# EAGLE board Syno_Ver1.2 (EAGLE 9.5.2)
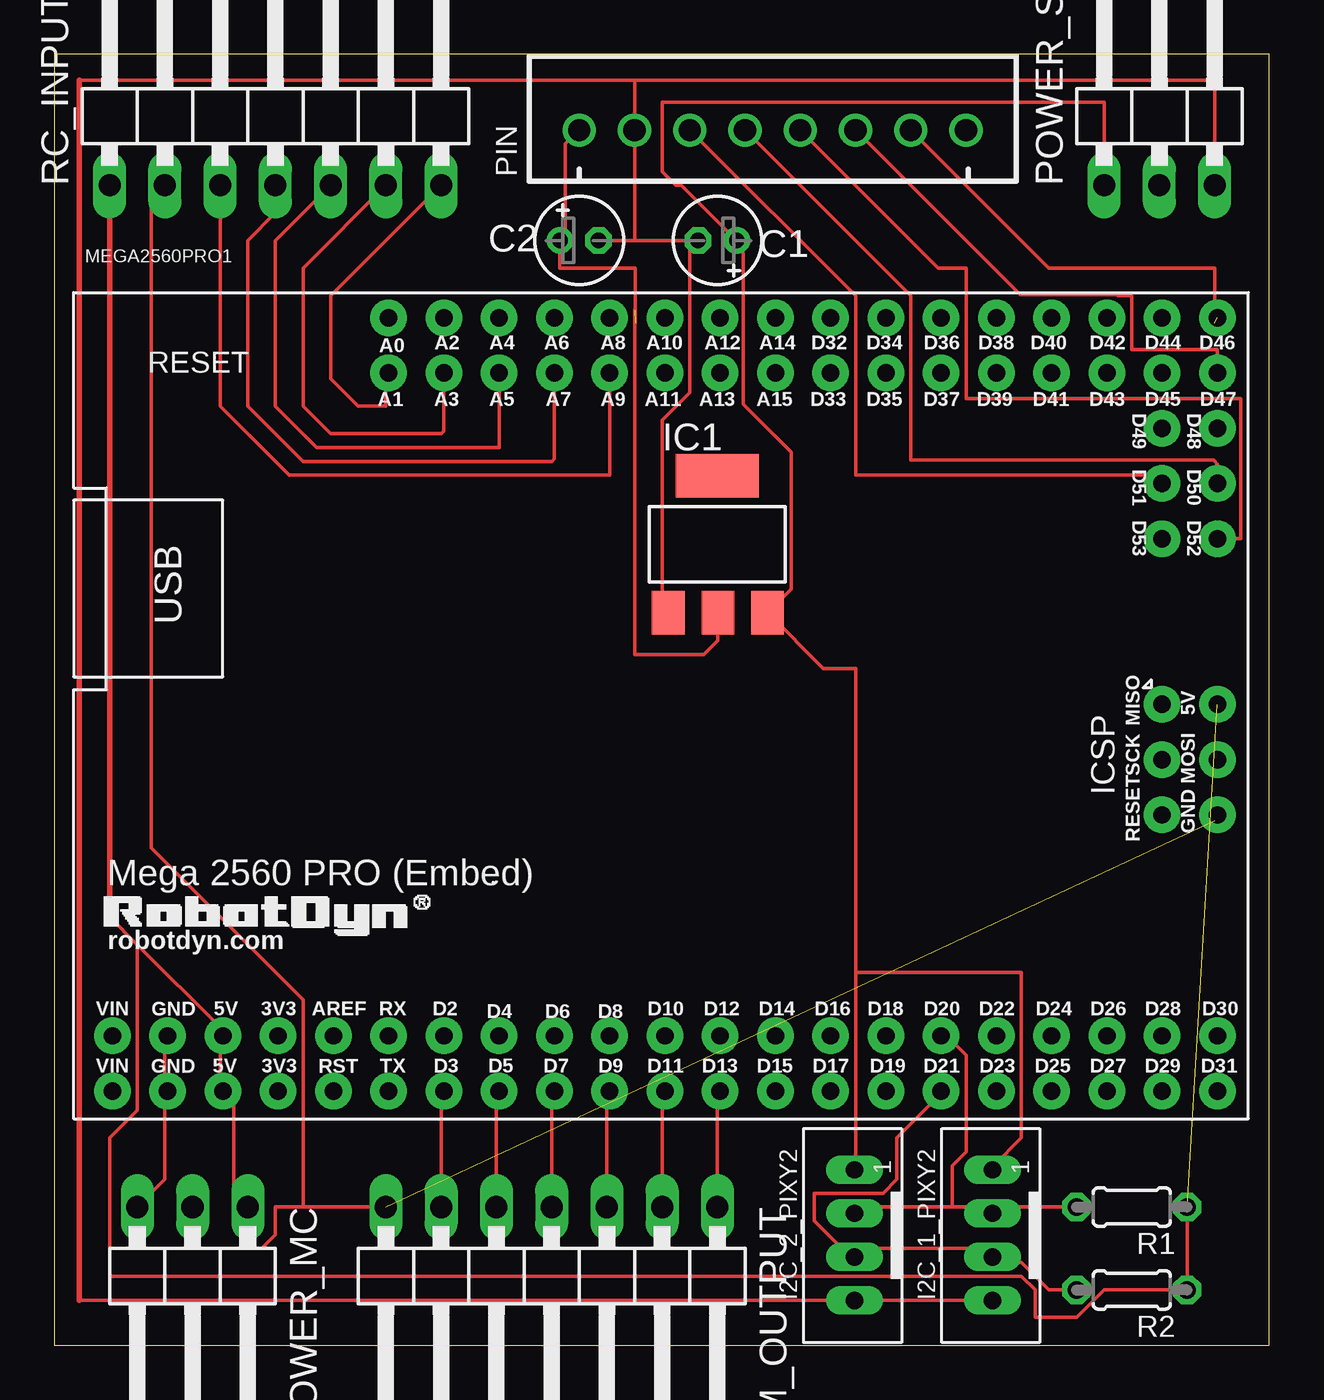
[diagram p0: board, top side]

Size 55.86 x 59.36 mm. Coordinates in mm from the lower left corner, seen from the top.
Outline: 0,0 55.86,0 55.86,59.36 0,59.36 0,0
Copper layers (1*16): Top 0.035mm / dielectric 1.5mm / Bottom 0.035mm
Design rules "default": minimum track width 6mil, minimum drill 0.35mm, track to track 6mil, track to pad 6mil, pad to pad 6mil, via to via 6mil, smd to smd 6mil, copper to edge 40mil, drill to drill 6mil, minimum pad ring 10mil, minimum via ring 8mil, stop-mask expansion 4mil, vias tented up to drill 0mil, thermal gap 10mil

## Footprints (pad centres in the part's own frame; a part is rotated, then mirrored left to right if it is on the bottom)
E1,8-4 = drill 0.711 pad 1.168: + -0.889,0 | drill 0.711 pad 1.168 octagon: - 0.889,0
JST_B4B-PH_HEADER = drill 0.8 long: P1 2.98,0.048; P2 0.98,0.048; P3 -1.02,0.048; P4 -3.02,0.048
SOT223 = smd 1.499 x 2.007: 1 -2.261,-3.15; 2 0.025,-3.15; 3 2.311,-3.15 | smd 3.81 x 2.007: 4 0,3.15
MEGA2560PRO-EMBED = drill 0.8 pad 1.676: 3V3@1 -25.4,-19.05; 3V3@2 -25.4,-16.51; 5V@1 -27.94,-19.05; 5V@2 -27.94,-16.51; 5V@3 17.78,-1.27; A0 -20.32,16.51; A1 -20.32,13.97; A2 -17.78,16.51; A3 -17.78,13.97; A4 -15.24,16.51; A5 -15.24,13.97; A6 -12.7,16.51; A7 -12.7,13.97; A8 -10.16,16.51; A9 -10.16,13.97; A10 -7.62,16.51; A11 -7.62,13.97; A12 -5.08,16.51; A13 -5.08,13.97; A14 -2.54,16.51; A15 -2.54,13.97; AREF -22.86,-16.51; D2 -17.78,-16.51; D3 -17.78,-19.05; D4 -15.24,-16.51; D5 -15.24,-19.05; D6 -12.7,-16.51; D7 -12.7,-19.05; D8 -10.16,-16.51; D9 -10.16,-19.05; D10 -7.62,-16.51; D11 -7.62,-19.05; D12 -5.08,-16.51; D13 -5.08,-19.05; D14 -2.54,-16.51; D15 -2.54,-19.05; D16 0,-16.51; D17 0,-19.05; D18 2.54,-16.51; D19 2.54,-19.05; D20 5.08,-16.51; D21 5.08,-19.05; D22 7.62,-16.51; D23 7.62,-19.05; D24 10.16,-16.51; D25 10.16,-19.05; D26 12.7,-16.51; D27 12.7,-19.05; D28 15.24,-16.51; D29 15.24,-19.05; D30 17.78,-16.51; D31 17.78,-19.05; D32 0,16.51; D33 0,13.97; D34 2.54,16.51; D35 2.54,13.97; D36 5.08,16.51; D37 5.08,13.97; D38 7.62,16.51; D39 7.62,13.97; D40 10.16,16.51; D41 10.16,13.97; D42 12.7,16.51; D43 12.7,13.97; D44 15.24,16.51; D45 15.24,13.97; D46 17.78,16.51; D47 17.78,13.97; D48 17.78,11.43; D49 15.24,11.43; D50 17.78,8.89; D51 15.24,8.89; D52 17.78,6.35; D53 15.24,6.35; GND@1 -30.48,-19.05; GND@2 -30.48,-16.51; GND@3 17.78,-6.35; MISO 15.24,-1.27; MOSI 17.78,-3.81; RESET 15.24,-6.35; RST -22.86,-19.05; RX -20.32,-16.51; SCK 15.24,-3.81; TX -20.32,-19.05; VIN@1 -33.02,-19.05; VIN@2 -33.02,-16.51
JST-XH-08-PACKAGE-ROUND-PAD = drill 1.016: 1 -8.89,0; 2 -6.35,0; 3 -3.81,0; 4 -1.27,0; 5 1.27,0; 6 3.81,0; 7 6.35,0; 8 8.89,0
1X03/90 = drill 1.016 long: 1 -2.54,-3.81; 2 0,-3.81; 3 2.54,-3.81
1X07/90 = drill 1.016 long: 1 -7.62,-3.81; 2 -5.08,-3.81; 3 -2.54,-3.81; 4 0,-3.81; 5 2.54,-3.81; 6 5.08,-3.81; 7 7.62,-3.81
0204/5 = drill 0.813 octagon: 1 -2.54,0; 2 2.54,0

## Placement (x,y rotation side)
C1  10  [E1,8-4]  30.48,50.8 180 top
C2  10  [E1,8-4]  24.13,50.8 0 top
I2C_1_PIXY2  [JST_B4B-PH_HEADER]  43.18,5.08 90 top
I2C_2_PIXY2  [JST_B4B-PH_HEADER]  36.83,5.08 90 top
IC1  REG1117  [SOT223]  30.48,36.83 0 top
MEGA2560PRO1  MEGA2560PRO-EMBED  [MEGA2560PRO-EMBED]  35.69,30.73 0 top
PIN  nRF24L01  [JST-XH-08-PACKAGE-ROUND-PAD]  33.02,55.88 0 top
POWER_MC  [1X03/90]  6.35,2.54 180 top
POWER_SENSOR  [1X03/90]  50.8,57.15 0 top
PWM_OUTPUT  [1X07/90]  22.86,2.54 180 top
R1  1000k  [0204/5]  49.53,6.35 180 top
R2  1000k  [0204/5]  49.53,2.54 180 top
RC_INPUT  [1X07/90]  10.16,57.15 0 top

## Library data of the parts
C1 C2 = rcl; SPICEPREFIX: C
I2C_1_PIXY2 I2C_2_PIXY2 = srg
IC1 = burr-brown; MPN: REG1117; OC_FARNELL: 1097566; OC_NEWARK: 14P6981
MEGA2560PRO1 = robotdyn
PIN = Rembrandt Electronics - JST XH Connectors v1-0
POWER_MC POWER_SENSOR PWM_OUTPUT RC_INPUT = pinhead
R1 R2 = rcl; SPICEPREFIX: R

## Nets
5V: MEGA2560PRO1.5V@1 MEGA2560PRO1.5V@2 MEGA2560PRO1.5V@3 POWER_MC.1 R1.1 R2.1 RC_INPUT.1
5V_S: C1.+ I2C_1_PIXY2.P1 I2C_2_PIXY2.P1 IC1.3 POWER_SENSOR.1
GND: MEGA2560PRO1.GND@1 MEGA2560PRO1.GND@2 MEGA2560PRO1.GND@3 POWER_MC.3 PWM_OUTPUT.7 RC_INPUT.2
GND_S: C1.- C2.- I2C_1_PIXY2.P4 I2C_2_PIXY2.P4 IC1.1 PIN.2 POWER_SENSOR.3
N$1: MEGA2560PRO1.D51 PIN.3
N$2: C2.+ IC1.2 PIN.1
N$3: MEGA2560PRO1.D50 PIN.4
N$4: MEGA2560PRO1.D52 PIN.5
N$5: MEGA2560PRO1.D47 PIN.6
N$6: MEGA2560PRO1.D46 PIN.7
N$7: MEGA2560PRO1.D13 PWM_OUTPUT.1
N$8: MEGA2560PRO1.D11 PWM_OUTPUT.2
N$9: MEGA2560PRO1.D9 PWM_OUTPUT.3
N$10: MEGA2560PRO1.D7 PWM_OUTPUT.4
N$11: MEGA2560PRO1.D5 PWM_OUTPUT.5
N$12: MEGA2560PRO1.D3 PWM_OUTPUT.6
N$13: MEGA2560PRO1.A9 RC_INPUT.3
N$14: MEGA2560PRO1.A7 RC_INPUT.4
N$15: MEGA2560PRO1.A5 RC_INPUT.5
N$16: MEGA2560PRO1.A3 RC_INPUT.6
N$17: MEGA2560PRO1.A1 RC_INPUT.7
SCL: I2C_1_PIXY2.P3 I2C_2_PIXY2.P3 MEGA2560PRO1.D21 R2.2
SDA: I2C_1_PIXY2.P2 I2C_2_PIXY2.P2 MEGA2560PRO1.D20 R1.2

## Tracks (layer width: path | path; a pad name or v marks a point on that pad's centre or on a via)
5V  (1 unrouted)
  Top 0.152: POWER_MC.1 8.26,6.99 8.26,11.43 MEGA2560PRO1.5V@1 7.62,12.07 7.62,13.97 MEGA2560PRO1.5V@2 7.62,14.61 3.81,18.41 | R1.1 R2.1 48.26,2.54 46.99,1.27 45.09,1.27 45.09,2.54 44.45,3.17 2.54,3.17 2.54,9.53 3.81,10.8 3.81,18.41 | 3.81,18.41 2.54,19.68
  Top 0.254: 2.54,19.68 RC_INPUT.1
5V_S
  Top 0.152: 36.83,17.14 36.83,31.11 35.36,31.11 IC1.3 33.88,34.77 33.88,41.08 31.67,43.29 31.67,50.23 31.37,50.53 C1.+ | 36.83,17.14 36.83,8.25 I2C_2_PIXY2.P1 | 36.83,17.14 44.45,17.14 44.45,9.53 43.18,8.25 I2C_1_PIXY2.P1 | 31.75,50.8 C1.+ | POWER_SENSOR.1 48.26,57.15 27.94,57.15 27.94,53.98 28.57,53.34 28.83,53.34 C1.+
GND  (1 unrouted)
  Top 0.152: 11.43,6.35 10.16,6.35 10.16,5.08 9.53,4.45 3.81,4.45 POWER_MC.3 5.08,7.62 5.08,11.43 MEGA2560PRO1.GND@1 5.08,12.07 5.08,13.97 MEGA2560PRO1.GND@2 | 11.43,6.35 PWM_OUTPUT.7 | RC_INPUT.2 4.45,52.7 4.45,22.86 11.43,15.88 11.43,6.35 | 53.34,24.13 MEGA2560PRO1.GND@3
GND_S
  Top 0.152: 29.21,50.8 29.21,43.81 27.94,42.55 27.94,33.96 IC1.1 | 29.21,50.8 26.67,50.8 | 26.67,50.8 C2.- | 29.21,50.8 C1.- | I2C_1_PIXY2.P4 I2C_2_PIXY2.P4 1.14,2.06 | POWER_SENSOR.3 53.34,58.17 26.67,58.17 | 1.14,58.17 26.67,58.17 | 26.67,58.17 PIN.2 26.67,50.8
  Top 0.254: 1.14,58.17 1.14,2.06
N$1
  Top 0.152: PIN.3 36.83,48.26 36.83,40.01 50.8,40.01 MEGA2560PRO1.D51
N$2  (1 unrouted)
  Top 0.152: PIN.1 23.5,55.24 23.5,50.8 C2.+ 23.24,49.53 26.7,49.53 26.7,46.99 | 26.67,47.62 26.67,31.75 29.84,31.75 30.5,32.41 IC1.2
N$3
  Top 0.152: 53.34,40.01 MEGA2560PRO1.D50 53.47,40.51 53.29,40.69 39.37,40.69 39.37,48.26 PIN.4
N$4
  Top 0.152: PIN.5 40.64,49.53 41.91,49.53 41.91,43.54 54.53,43.54 54.53,37.08 MEGA2560PRO1.D52
N$5
  Top 0.152: PIN.6 44.4,48.31 48.83,48.31 48.88,48.26 49.53,48.26 49.53,45.77 53.47,45.77 MEGA2560PRO1.D47
N$6  (1 unrouted)
  Top 0.152: PIN.7 45.72,49.53 53.34,49.53 53.34,46.99
N$7
  Top 0.152: PWM_OUTPUT.1 30.48,11.43 MEGA2560PRO1.D13
N$8
  Top 0.152: PWM_OUTPUT.2 27.94,11.43 MEGA2560PRO1.D11
N$9
  Top 0.152: PWM_OUTPUT.3 25.4,11.43 MEGA2560PRO1.D9
N$10
  Top 0.152: PWM_OUTPUT.4 22.86,11.43 MEGA2560PRO1.D7
N$11
  Top 0.152: PWM_OUTPUT.5 20.32,11.43 MEGA2560PRO1.D5
N$12
  Top 0.152: PWM_OUTPUT.6 17.78,11.43 MEGA2560PRO1.D3
N$13
  Top 0.152: RC_INPUT.3 7.62,43.18 10.79,40.01 25.53,40.01 MEGA2560PRO1.A9
N$14
  Top 0.152: MEGA2560PRO1.A7 22.99,40.77 22.86,40.64 11.43,40.64 8.89,43.18 8.89,50.8 10.16,52.07 RC_INPUT.4
N$15
  Top 0.152: MEGA2560PRO1.A5 20.45,41.27 12.06,41.27 10.16,43.18 10.16,50.8 RC_INPUT.5
N$16
  Top 0.152: MEGA2560PRO1.A3 17.91,42.04 17.78,41.91 12.7,41.91 11.43,43.18 11.43,49.53 RC_INPUT.6
N$17
  Top 0.152: RC_INPUT.7 12.7,48.26 12.7,44.45 13.97,43.18 15.24,43.18 15.24,44.45 15.18,44.51 MEGA2560PRO1.A1
SCL
  Top 0.152: R2.2 45.72,2.54 44.45,3.81 43.18,3.81 I2C_1_PIXY2.P3 42.55,4.45 36.83,4.45 I2C_2_PIXY2.P3 36.58,4.06 34.92,5.71 34.92,6.99 38.1,6.99 38.73,7.62 38.73,9.53 40.64,11.43 MEGA2560PRO1.D21
SDA
  Top 0.152: 41.27,6.35 42.55,6.35 I2C_1_PIXY2.P2 43.18,6.35 R1.2 | 41.27,6.35 36.83,6.35 I2C_2_PIXY2.P2 | 41.27,6.35 41.27,8.25 41.91,8.89 41.91,13.34 41.27,13.97 MEGA2560PRO1.D20